# Altium PCB Microcontroller.PcbDoc
Units mil, origin at the board's own origin, x right, y up, seen from the top; angles counter-clockwise.
Board outline 4322.64 x 2121.95 mil, 2 copper layers (Top Layer, Bottom Layer), stack 62.209 mil thick; 5 components, 12 nets, 58 pads, 0 vias.
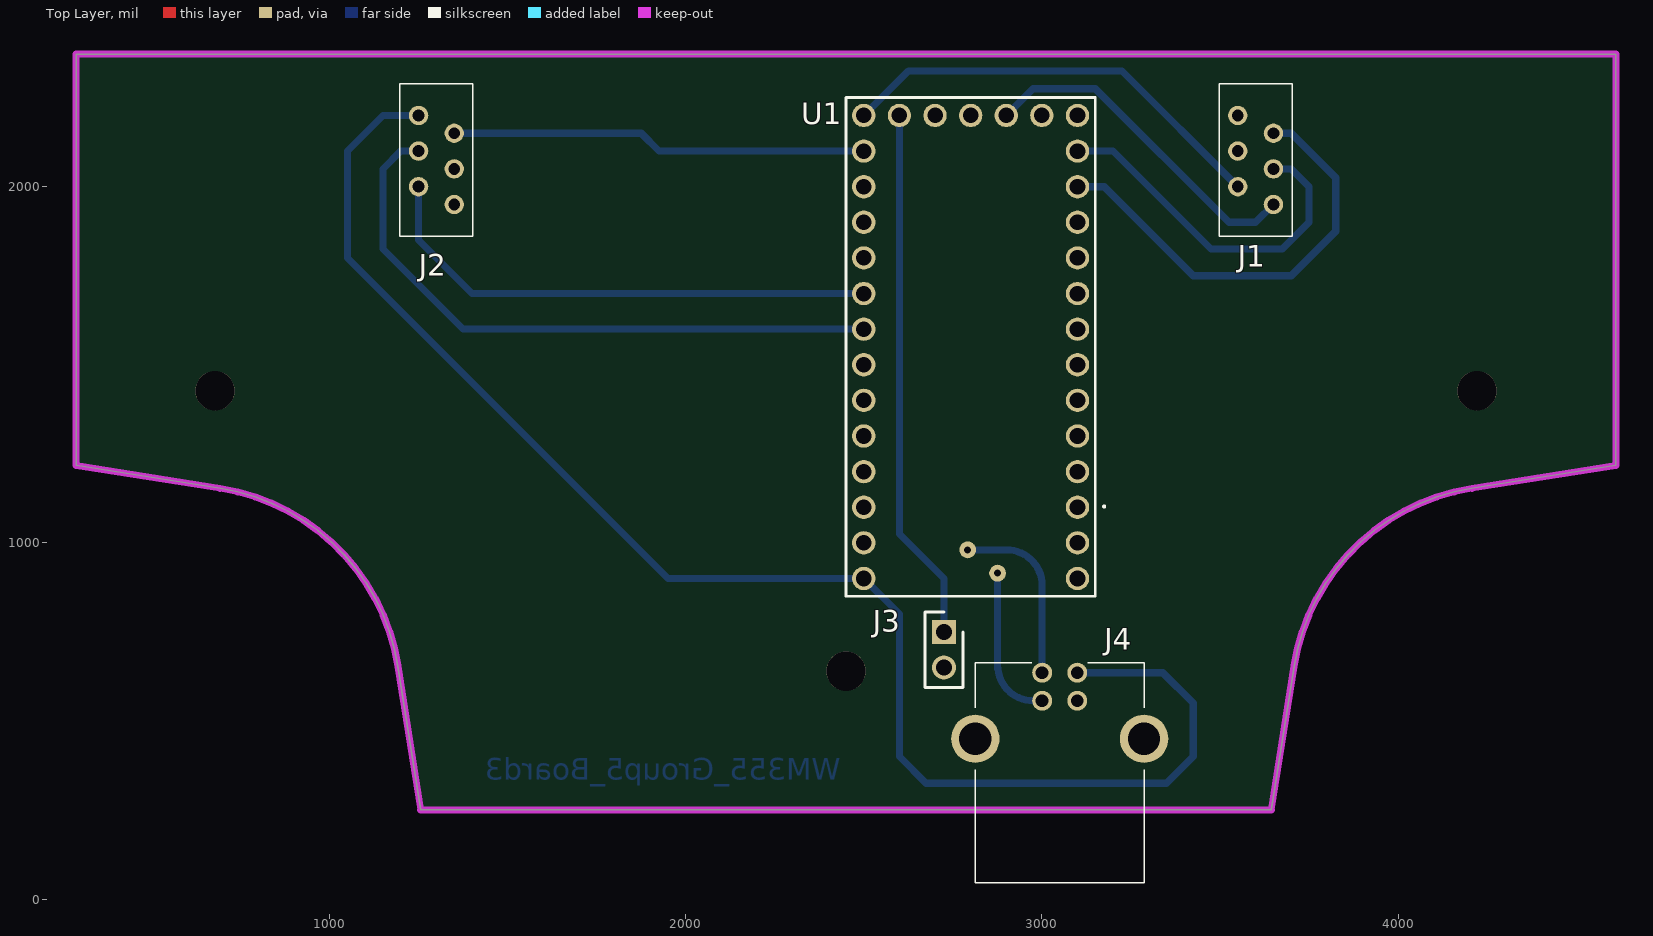
[diagram p0: Top Layer view]
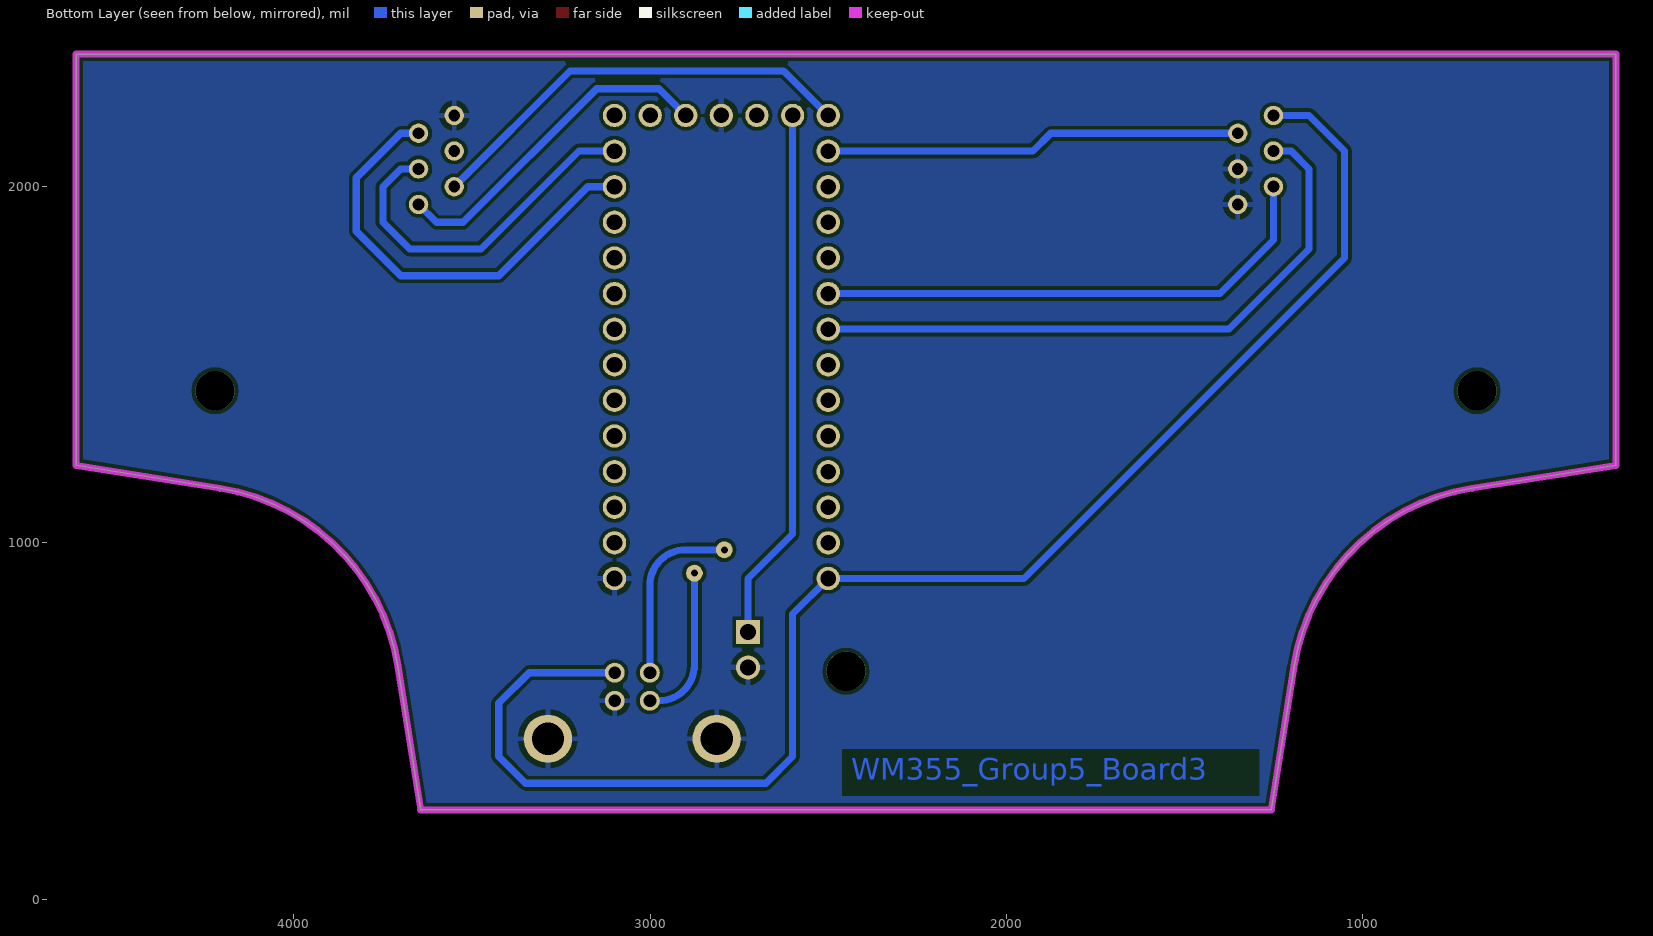
[diagram p1: Bottom Layer view, seen from below]
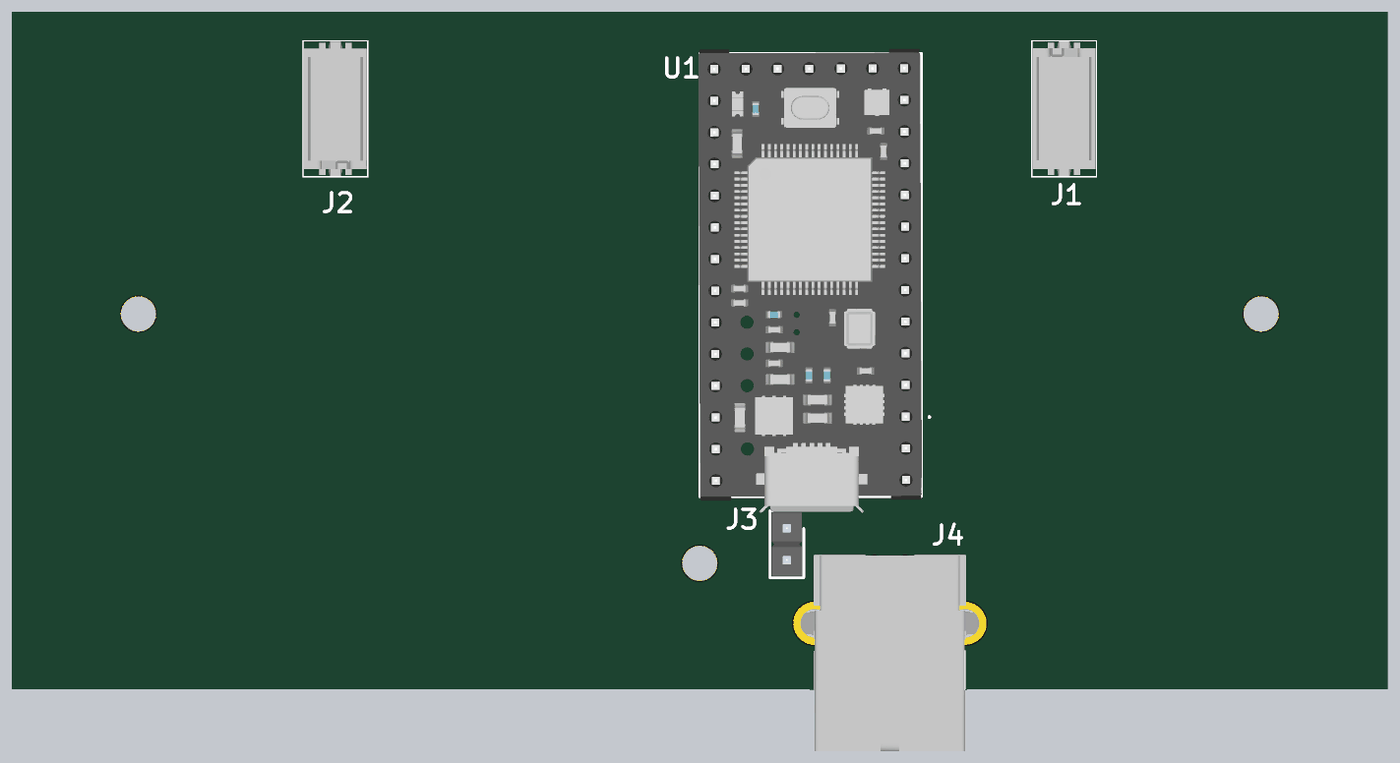
[diagram p2: 3D render of the assembled board from above, using the file's embedded part models]

## Layer stack, top to bottom
Top Solder: solder mask 0.4, Solder Resist, Dk 3.5
Top Layer: signal copper 1.4
Dielectric 1: dielectric 59.4094, FR-4, Dk 4.8
Bottom Layer: signal copper 1.4
Bottom Solder: solder mask 0.4, Solder Resist, Dk 3.5

## Board outline
3708.03,654.21 3717.97,703.5 3732,751.79 3750.02,798.73 3771.9,844 3797.5,887.29 3826.63,928.27 3859.08,966.68 3894.64,1002.24 3933.05,1034.69 3974.03,1063.82 4017.31,1089.42 4062.59,1111.3 4109.53,1129.32 4157.82,1143.35 4207.11,1153.29 4611.32,1217.31 4611.32,2371.95 288.68,2371.95 288.68,1217.31 692.89,1153.29 742.18,1143.35 790.47,1129.32 837.41,1111.3 882.69,1089.42 925.97,1063.82 966.95,1034.69 1005.36,1002.24 1040.92,966.68 1073.37,928.27 1102.5,887.29 1128.1,844 1149.98,798.73 1168,751.79 1182.03,703.5 1191.97,654.21 1255.99,250 3644.01,250

## Design rules (kind name [scope] priority, off if disabled: settings)
Clearance [All] p1: gap=10 ignorepadtopadclearanceinfootprint=FALSE except(0: Arc-Hole Track-Hole SMDPad-Hole THPad-Hole Via-Hole Fill-Hole Poly-Hole Region-Hole Text-Hole)
HoleSize [All] p1: absolutevalues=TRUE maxlimit=200 minlimit=1 maxpercent=80.000 minpercent=20.000
PlaneClearance [All] p1: clearance=15
PolygonConnect [All] p1: connectstyle=Relief reliefconductorwidth=15 reliefentries=4 polygonreliefangle="90 Angle" airgapwidth=15
RoutingVias [All] p1: holewidth=28 width=50 viastyle="Through Hole" minholewidth=28 minwidth=50 maxholewidth=28 maxwidth=50
SolderMaskExpansion [All] p1: expansion=4 istentingtop=FALSE
Width Width_3 [InNet('+5V')] p1: maxlimit=20 minlimit=10 preferedwidth=20
Width Width_2 [InNet('+3.3V')] p2: maxlimit=20 minlimit=10 preferedwidth=20
Width [InNet('GND')] p3: maxlimit=20 minlimit=10 preferedwidth=20
Width Width_1 [All] p4: maxlimit=20 minlimit=10 preferedwidth=10 minimp=50.000000 maximp=50.000000 favimp=50.000000
28 further rules are at their usual default settings.

## Components (designator, comment, footprint, x,y, rotation, side; value= is the part's Value field where it differs from the comment)
J1 "215464-6" 2154646 3650,1950 r90 top
J2 "215464-6" 2154646 1250,2200 r270 top
J3 "HDR_1x2_2.54" HDR_1x2_2.54 2725,750 r270 top
J4 "USB-B-TH" USB-B-TH 3050,450 r0 top
U1 "TEENSY - 3.2" TEENSY-3.2 3100,1100 r90 top

## Footprints (in the part's own frame and the unit in brackets; to place one, negate y for a bottom-side part, rotate by r counter-clockwise, add the part's x,y. Pads: shape width x height; smd on the part's side, far side on the other; paste and mask are expansions set on the pad)
2154646 [mm]
  round 1.381 hole 0.85: 1(0,0) 2(1.27,2.54) 3(2.54,0) 4(3.81,2.54) 5(5.08,0) 6(6.35,2.54)
  silkscreen extent -2.27,-1.33 8.62,3.87, body extent -2.22,-1.23 8.58,3.77, height 7.01
HDR_1x2_2.54 [mm] "2 Pin 0.1\" Header"
  rect 1.725x1.725 hole 1.15: 1(0,0)
  round 1.725 hole 1.15: 2(2.54,0)
  silkscreen extent -1.42,-1.36 3.96,1.36, body extent -1.27,-1.2 3.81,1.2, height 8.43
TEENSY-3.2 [mm]
  round 1.665 hole 1.11: 1(0,0) 2(2.54,0) 3(5.08,0) 4(7.62,0) 5(10.16,0) 6(12.7,0) 7(15.24,0) 8(17.78,0) 9(20.32,0) 10(22.86,0) 11(25.4,0) 12(27.94,0) 13(27.94,15.24) 14(25.4,15.24) 15(22.86,15.24) 16(20.32,15.24) 17(17.78,15.24) 18(15.24,15.24) 19(12.7,15.24) 20(10.16,15.24) 21(7.62,15.24) 22(5.08,15.24) 23(2.54,15.24) 24(0,15.24) 25(-2.54,15.24) 26(-5.08,15.24) 31(27.94,2.54) 32(27.94,5.08) 33(27.94,7.62) 34(27.94,10.16) 35(27.94,12.7) 36(-5.08,0) 37(-2.54,0)
  round 1.2 hole 0.5: 38(-4.7,5.7) 39(-3.04,7.83)
  silkscreen extent -6.35,-1.95 29.22,16.51, body extent -7.69,-1.3 29.59,16.63, height 15.54
USB-B-TH [mm]
  round 1.42 hole 0.92: 1(1.25,4.71) 2(-1.25,4.71) 3(-1.25,2.71) 4(1.25,2.71)
  round 3.45 hole 2.3: 5(6.02,0) 6(-6.02,0)
  silkscreen extent -6.02,-10.28 6.02,5.43, body extent -7.19,-10.27 7.19,5.43, height 11.53

## Part data
J1 J2: "Micro-Match Connector Male 6-Way", Manufacturer_Name="TE Connectivity", Mouser Part Number=571-215464-6, Arrow Part Number=215464-6, Arrow Price/Stock=https://www.arrow.com/en/products/215464-6/te-connectivity, Datasheet Link=https://www.te.com/commerce/DocumentDelivery/DDEController?Action=srchrtrv&DocNm=215464&DocType=Customer+Drawing&DocLang=English&DocFormat=pdf&PartCntxt=215464-6, Height=3.6mm, Manufacturer_Part_Number=215464-6, Mouser Price/Stock=https://www.mouser.co.uk/ProductDetail/TE-Connectivity/215464-6?qs=XAKIUOoRPe5vrTUOsg1hdg%3D%3D, System=Connector
J3: "0.1\" Male Header Connector", Arrow Part Number=10129378-902001BLF, Manufacturer_Name=Amphenol, Mouser Part Number=649-1012937890201BLF, Arrow Price/Stock=https://www.arrow.com/en/products/10129378-902001blf/amphenol-fci?region=nac, Datasheet Link=https://www.mouser.co.uk/datasheet/2/18/10129378-1530218.pdf, Height=8.43mm, Manufacturer_Part_Number=10129378-902001BLF, Mouser Price/Stock=https://www.mouser.co.uk/ProductDetail/Amphenol-FCI/10129378-902001BLF?qs=0lQeLiL1qybv6C1q0T3%2FPw%3D%3D
J4: "USB Type B Connector - Thru-Hole", Arrow Part Number=292304-1, Manufacturer_Name="TE Connectivity", Mouser Part Number=571-292304-1, Arrow Price/Stock=https://www.arrow.com/en/products/292304-1/te-connectivity?region=europe, Datasheet Link=https://www.te.com/commerce/DocumentDelivery/DDEController?Action=srchrtrv&DocNm=7-1773442-0&DocType=Data+Sheet&DocLang=English&PartCntxt=292304-1&DocFormat=pdf, Manufacturer_Part_Number=292304-1, Mouser Price/Stock=https://www.mouser.co.uk/ProductDetail/TE-Connectivity/292304-1?qs=G%2F5vCLrg9vwiXeMJMHNpsA%3D%3D
U1: library part TEENSY-3.2, "ARM Development Board", Manufacturer_Name=PJRC, Manufacturer_Part_Number=TEENSY3.2, Datasheet Link=https://www.pjrc.com/store/teensy32.html, Height=4.07mm

## Free pads (board coordinates)
  round 110.24 hole 110.24: 1(678.35,1427.07) 1(2450,639.67) 1(4221.65,1427.07)

## Nets (pads, with @x,y where several pads share a name; then routed paths per layer and width w, separated by ;. In a path a pad name is that pad's centre, name@x,y a point inside that pad or via, vN(x,y) a via of type N, cw(c..) or ccw(c..) an arc to the next point about the centre after c; other vN are vias at no path point)
+3.3V: J1.1 U1.32 | length 957.1
  Bottom Layer w20: U1.32 2975,2275 3150,2275 3525,1900 3600,1900 J1.1
+5V: J2.1 J4.1 U1.26 | length 4303.9
  Bottom Layer w20: J2.1 1150,2200 1050,2100 1050,1800 1950,900 U1.26 2600,800 2600,400 2675,325 3350,325 3425,400 3425,550 3339.57,635.43 J4.1
BP_Out: J2.2 U1.14 | length 1170.7
  Bottom Layer w20: J2.2 1875,2150 1925,2100 U1.14
D_Test: J3.1 U1.35 | length 1501.8
  Bottom Layer w20: U1.35 2600,1025 2725,900 J3.1
FSYNC: J1.5 U1.10 | length 1257.1
  Bottom Layer w20: U1.10 3175,2000 3425,1750 3700,1750 3825,1875 3825,2025 3700,2150 J1.5
GND: J1.6 J2.4 J2.6 J3.2 J4.4 J4.5 J4.6 U1.33 U1.36
SCL: J2.3 U1.19 | length 1788.9
  Bottom Layer w20: J2.3 1200,2100 1150,2050 1150,1825 1375,1600 U1.19
SCLK: J1.2 U1.13 | length 1236.4
  Bottom Layer w20: U1.13 2625,2325 3225,2325 J1.2
SDA: J2.5 U1.18 | length 1462.1
  Bottom Layer w20: J2.5 1250,1850 1400,1700 U1.18
SDATA: J1.3 U1.11 | length 1015.7
  Bottom Layer w20: U1.11 3200,2100 3475,1825 3675,1825 3750,1900 3750,2000 3700,2050 J1.3
USB_D+: J4.3 U1.38 | length 446.4
  Bottom Layer w10: U1.38 U1.38@2879.76,910.79 ; J4.3@2975.59,556.69 J4.3
  Bottom Layer w20: U1.38 2875.59,656.69 ccw(c2975.59,656.69) J4.3@2975.59,556.69
USB_D-: J4.2 U1.39 | length 518.5
  Bottom Layer w10: U1.39 U1.39@2797.05,975
  Bottom Layer w20: U1.39 2900.79,980.32 cw(c2900.79,880.32) 3000.79,880.32 J4.2
pads on no net: J1.4 U1.1 U1.2 U1.3 U1.4 U1.5 U1.6 U1.7 U1.8 U1.9 U1.12 U1.15 U1.16 U1.17 U1.20 U1.21 U1.22 U1.23 U1.24 U1.25 U1.31 U1.34 U1.37

## Polygon pours and split planes (outlines as drawn)
GND on Bottom Layer "GND_L02_P001" (solid, pour order 1): 3708.03,654.21 3717.97,703.5 3732,751.79 3750.02,798.73 3771.9,844 3797.5,887.29 3826.63,928.27 3859.08,966.68 3894.64,1002.24 3933.05,1034.69 3974.03,1063.82 4017.31,1089.42 4062.59,1111.3 4109.53,1129.32 4157.82,1143.35 4207.11,1153.29 4611.32,1217.31 4611.32,2371.95 288.68,2371.95 288.68,1217.31 692.89,1153.29 742.18,1143.35 790.47,1129.32 837.41,1111.3 882.69,1089.42 925.97,1063.82 966.95,1034.69 1005.36,1002.24 1040.92,966.68 1073.37,928.27 1102.5,887.29 1128.1,844 1149.98,798.73 1168,751.79 1182.03,703.5 1191.97,654.21 1255.99,250 3644.01,250

## Keep-outs
Keep-Out Layer:
  the board outline again, w19.68

## Other copper
Bottom Layer:
  text "WM355_Group5_Board3" at 2435,334.99 h60

## Silkscreen, mask and mechanical layers (free items; w line width, h text height)
Mechanical 16:
  the board outline again, w19.68